# EAGLE board STorM32 BGC mpu module v009 pannelized4 (EAGLE 6.5.0)
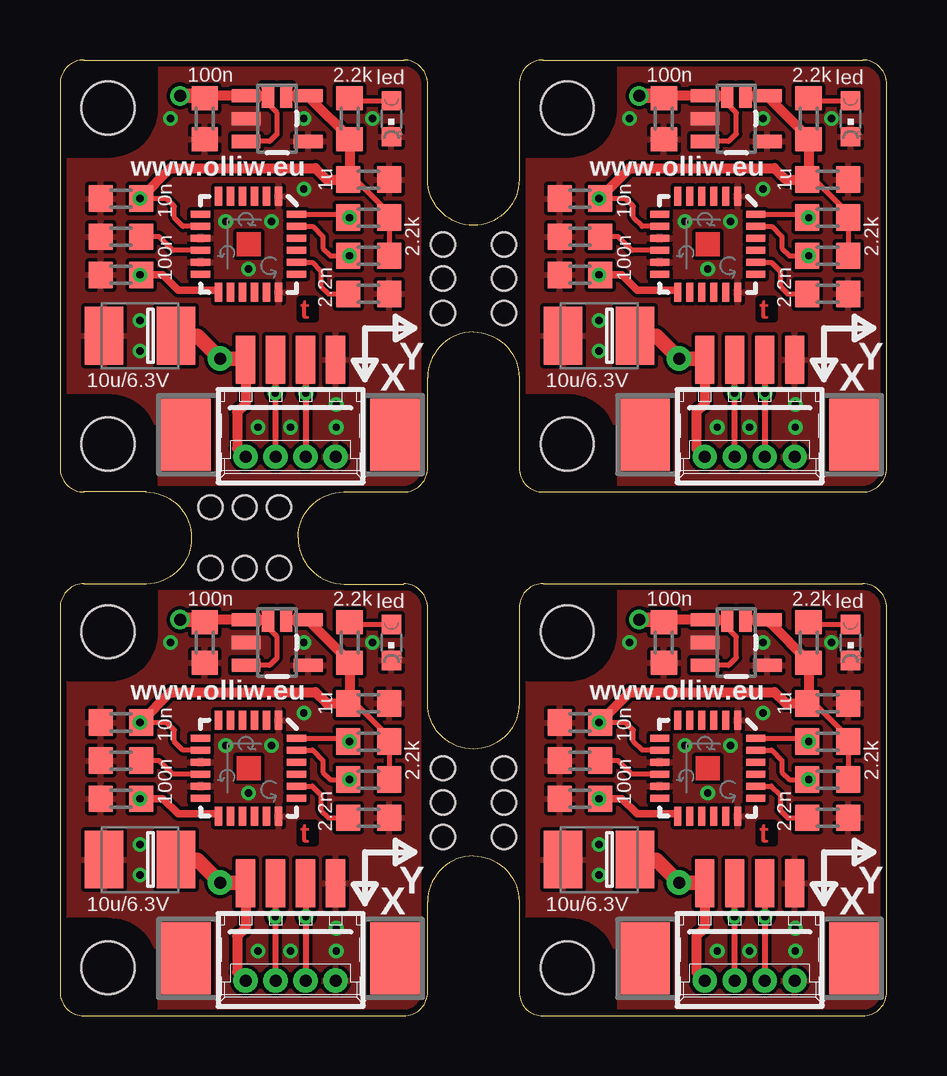
[diagram p0: board, top side]
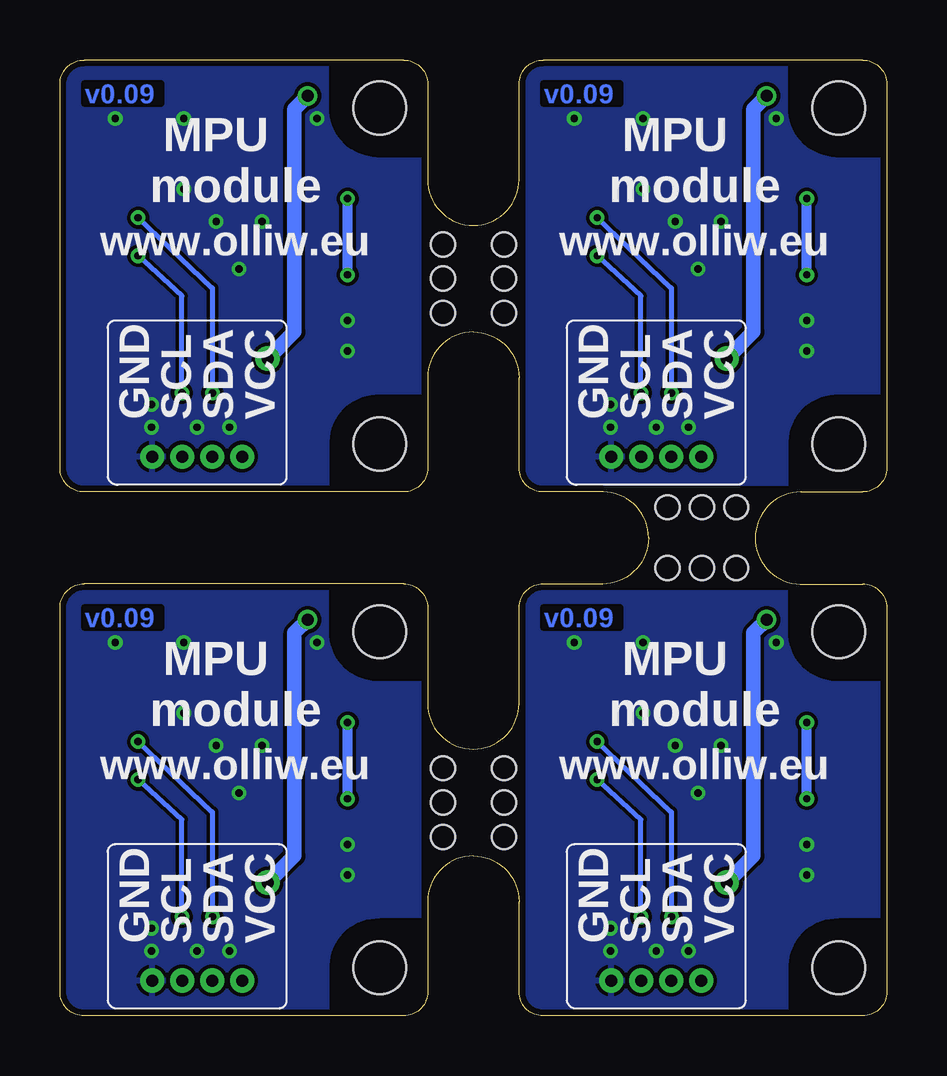
[diagram p1: board, bottom side, seen from below]

Size 34.45 x 39.83 mm. Coordinates in mm from the lower left corner, seen from the top.
Outline: 1,18 arc90 0,17 0,1 arc90 1,0 14.32,0 arc90 15.32,1
Outline: 15.32,17 arc90 14.32,18
Outline: 15.32,0.95 15.32,4.76 arc-90 17.22,6.67 arc-90 19.13,4.76 19.13,1 arc90 20.13,0 33.45,0 arc90 34.45,1 34.45,17 arc90 33.45,18 20.13,18 arc90 19.13,17 19.13,13.02 arc-90 17.22,11.11 arc-90 15.32,13.02 15.32,16.99
Outline: 15.32,38.83 arc90 14.32,39.83 1,39.83 arc90 0,38.83 0,22.83 arc90 1,21.83
Outline: 14.32,21.83 arc90 15.32,22.83
Outline: 15.32,22.78 15.32,26.59 arc-90 17.22,28.5 arc-90 19.13,26.59 19.13,22.83 arc90 20.13,21.83 33.45,21.83 arc90 34.45,22.83 34.45,38.83 arc90 33.45,39.83 20.13,39.83 arc90 19.13,38.83 19.13,34.85 arc-90 17.22,32.94 arc-90 15.32,34.85 15.32,38.81
Outline: 3.57,21.83 arc-90 5.48,19.92 arc-90 3.6,17.99
Outline: 11.83,21.83 arc90 9.92,19.92 arc90 11.85,17.99
Outline: 3.58,21.83 0.99,21.83
Outline: 3.58,17.99 0.99,17.99
Outline: 11.84,17.99 11.85,17.99
Outline: 11.85,17.99 14.33,17.99
Outline: 11.81,21.83 14.33,21.83
Copper layers (1*16): Top 0.035mm / dielectric 1.5mm / Bottom 0.035mm
Design rules "Fusion_eagle_rule_v1.1-shapes-supply-changed": minimum track width 6mil, minimum drill 12mil, track to track 6mil, track to pad 6mil, pad to pad 6mil, via to via 6mil, smd to smd 0mil, copper to edge 10mil, drill to drill 10mil, minimum pad ring 10mil, minimum via ring 6mil, stop-mask expansion 2mil, vias tented up to drill 100mil, thermal gap 6mil
Holes 2.2 mm at 2,2 2,16 21.13,2 21.13,16 2,23.83 2,37.83 21.13,23.83 21.13,37.83
Holes 1 mm at 15.95,10.32 15.95,8.89 15.95,7.46 18.49,10.32 18.49,8.89 18.49,7.46 15.95,32.15 15.95,30.72 15.95,29.29 18.49,32.15 18.49,30.72 18.49,29.29 6.27,18.65 7.7,18.65 9.13,18.65 6.27,21.19 7.7,21.19 9.13,21.19

## Footprints (pad centres in the part's own frame; a part is rotated, then mirrored left to right if it is on the bottom)
SMC_B = smd 1.6 x 2.4: + -1.5,0; - 1.5,0
C0603 = smd 1 x 1.1: 1 -0.85,0; 2 0.85,0
QFN-24 = smd 0.8 x 0.3: 1 -2,1.25; 2 -2,0.75; 3 -2,0.25; 4 -2,-0.25; 5 -2,-0.75; 6 -2,-1.25; 13 2,-1.25; 14 2,-0.75; 15 2,-0.25; 16 2,0.25; 17 2,0.75; 18 2,1.25 | smd 0.3 x 0.8: 7 -1.25,-2; 8 -0.75,-2; 9 -0.25,-2; 10 0.25,-2; 11 0.75,-2; 12 1.25,-2; 19 1.25,2; 20 0.75,2; 21 0.25,2; 22 -0.25,2; 23 -0.75,2; 24 -1.25,2
SOT23-5 = smd 0.55 x 1.2: 1 -0.95,-1.3; 2 0,-1.3; 3 0.95,-1.3; 4 0.95,1.3; 5 -0.95,1.3
MOLEX-53261-04-SMD-BOTH = smd 0.8 x 2: 1 1.875,-2.5; 2 0.625,-2.5; 3 -0.625,-2.5; 4 -1.875,-2.5 | drill 0.5 pad 0.698: 5 1.875,1.545; 6 0.625,1.545; 7 -0.625,1.545; 8 -1.875,1.545 | smd 2.1 x 3: S1 4.375,0.625; S2 -4.375,0.625
CHIPLED_0603 = smd 0.8 x 0.8: A 0,-0.75; C 0,0.75
R0603 = smd 1 x 1.1: 1 -0.85,0; 2 0.85,0
SJ_2S-NO = smd 0.508 x 1.016: 1 -0.381,0; 2 0.381,0

## Placement (x,y rotation side)
C1  10u/6.3V  [SMC_B]  3.33,6.51 180 top
C2  100n  [C0603]  6.03,15.56 270 top
C3  100n  [C0603]  2.54,9.05 180 top
C4  10n  [C0603]  2.54,12.22 180 top
C5  2.2n  [C0603]  12.86,8.25 0 top
C6  100n  [C0603]  2.54,10.64 180 top
C7  1u  [C0603]  12.86,13.02 0 top
C8  10u/6.3V  [SMC_B]  22.46,6.51 180 top
C9  100n  [C0603]  21.67,10.64 180 top
C10  10n  [C0603]  21.67,12.22 180 top
C11  2.2n  [C0603]  31.99,8.25 0 top
C12  100n  [C0603]  21.67,9.05 180 top
C13  100n  [C0603]  25.16,15.56 270 top
C14  1u  [C0603]  31.99,13.02 0 top
C15  10u/6.3V  [SMC_B]  3.33,28.34 180 top
C16  100n  [C0603]  2.54,32.46 180 top
C17  10n  [C0603]  2.54,34.05 180 top
C18  2.2n  [C0603]  12.86,30.08 0 top
C19  100n  [C0603]  2.54,30.88 180 top
C20  100n  [C0603]  6.03,37.39 270 top
C21  1u  [C0603]  12.86,34.85 0 top
C22  10u/6.3V  [SMC_B]  22.46,28.34 180 top
C23  100n  [C0603]  21.67,32.46 180 top
C24  10n  [C0603]  21.67,34.05 180 top
C25  2.2n  [C0603]  31.99,30.08 0 top
C26  100n  [C0603]  21.67,30.88 180 top
C27  100n  [C0603]  25.16,37.39 270 top
C28  1u  [C0603]  31.99,34.85 0 top
IC1  MPU6050  [QFN-24]  7.86,10.32 270 top
IC2  [SOT23-5]  9.05,15.56 270 top
IC3  MPU6050  [QFN-24]  26.99,10.32 270 top
IC4  [SOT23-5]  28.18,15.56 270 top
IC5  MPU6050  [QFN-24]  7.86,32.15 270 top
IC6  [SOT23-5]  9.05,37.39 270 top
IC7  MPU6050  [QFN-24]  26.99,32.15 270 top
IC8  [SOT23-5]  28.18,37.39 270 top
JP1  I2C#2  [MOLEX-53261-04-SMD-BOTH]  9.6,3.02 180 top
JP2  I2C#2  [MOLEX-53261-04-SMD-BOTH]  28.73,3.02 180 top
JP3  I2C#2  [MOLEX-53261-04-SMD-BOTH]  9.6,24.84 180 top
JP4  I2C#2  [MOLEX-53261-04-SMD-BOTH]  28.73,24.84 180 top
LED1  red  [CHIPLED_0603]  13.81,15.56 180 top
LED2  red  [CHIPLED_0603]  32.94,15.56 180 top
LED3  red  [CHIPLED_0603]  13.81,37.39 180 top
LED4  red  [CHIPLED_0603]  32.94,37.39 180 top
R1  2.2k  [R0603]  12.06,15.56 90 top
R2  2.2k  [R0603]  12.86,9.84 0 top
R3  2.2k  [R0603]  12.86,11.43 0 top
R4  2.2k  [R0603]  31.99,9.84 0 top
R5  2.2k  [R0603]  31.99,11.43 0 top
R6  2.2k  [R0603]  31.19,15.56 90 top
R7  2.2k  [R0603]  12.86,31.67 0 top
R8  2.2k  [R0603]  12.86,33.26 0 top
R9  2.2k  [R0603]  12.06,37.39 90 top
R10  2.2k  [R0603]  31.99,31.67 0 top
R11  2.2k  [R0603]  31.99,33.26 0 top
R12  2.2k  [R0603]  31.19,37.39 90 top
SJ1  SOLDERJUMPERNO  [SJ_2S-NO]  9.05,16.51 0 top
SJ2  SOLDERJUMPERNO  [SJ_2S-NO]  28.18,16.51 0 top
SJ3  SOLDERJUMPERNO  [SJ_2S-NO]  9.05,38.34 0 top
SJ4  SOLDERJUMPERNO  [SJ_2S-NO]  28.18,38.34 0 top

## Library data of the parts
C1-C28 R1-R12 = rcl
IC1-IC8 SJ1-SJ4 = # SparkFun2
JP1-JP4 = # stdlib
LED1-LED4 = led

## Nets
3.3V: C3.1 C4.1 C7.1 IC1.8 IC1.13 IC2.5 R1.1 R2.2 R3.2 SJ1.2
3.3V1: C10.1 C12.1 C14.1 IC3.8 IC3.13 IC4.5 R4.2 R5.2 R6.1 SJ2.2
3.3V2: C17.1 C19.1 C21.1 IC5.8 IC5.13 IC6.5 R7.2 R8.2 R9.1 SJ3.2
3.3V3: C24.1 C26.1 C28.1 IC7.8 IC7.13 IC8.5 R10.2 R11.2 R12.1 SJ4.2
5V: C1.+ C2.1 IC2.1 IC2.3 JP1.1 JP1.5 SJ1.1
5V1: C8.+ C13.1 IC4.1 IC4.3 JP2.1 JP2.5 SJ2.1
5V2: C15.+ C20.1 IC6.1 IC6.3 JP3.1 JP3.5 SJ3.1
5V3: C22.+ C27.1 IC8.1 IC8.3 JP4.1 JP4.5 SJ4.1
GND: C1.- C2.2 C3.2 C4.2 C5.2 C6.2 C7.2 IC1.1 IC1.9 IC1.11 IC1.18 IC2.2 IC2.4 JP1.4 JP1.8 LED1.C
GND4: C8.- C9.2 C10.2 C11.2 C12.2 C13.2 C14.2 IC3.1 IC3.9 IC3.11 IC3.18 IC4.2 IC4.4 JP2.4 JP2.8 LED2.C
GND5: C15.- C16.2 C17.2 C18.2 C19.2 C20.2 C21.2 IC5.1 IC5.9 IC5.11 IC5.18 IC6.2 IC6.4 JP3.4 JP3.8 LED3.C
GND6: C22.- C23.2 C24.2 C25.2 C26.2 C27.2 C28.2 IC7.1 IC7.9 IC7.11 IC7.18 IC8.2 IC8.4 JP4.4 JP4.8 LED4.C
N$1: LED2.A R6.2
N$2: C9.1 IC3.10
N$3: C11.1 IC3.20
N$4: LED3.A R9.2
N$5: C16.1 IC5.10
N$6: C18.1 IC5.20
N$7: LED4.A R12.2
N$8: C23.1 IC7.10
N$9: LED1.A R1.2
N$10: C25.1 IC7.20
N$20: C6.1 IC1.10
N$24: C5.1 IC1.20
SCL: IC1.23 JP1.3 JP1.7 R2.1
SCL1: IC3.23 JP2.3 JP2.7 R4.1
SCL2: IC5.23 JP3.3 JP3.7 R7.1
SCL3: IC7.23 JP4.3 JP4.7 R10.1
SDA: IC1.24 JP1.2 JP1.6 R3.1
SDA1: IC3.24 JP2.2 JP2.6 R5.1
SDA2: IC5.24 JP3.2 JP3.6 R8.1
SDA3: IC7.24 JP4.2 JP4.6 R11.1

## Tracks (layer width: path | path; a pad name or v marks a point on that pad's centre or on a via)
3.3V  (via drill 0.3 pad 0.61)
  Top 0.152: 13.65,11.67 R3.2 | v3.33,12.22 C4.1
  Top 0.203: R3.2 R2.2 | 13.65,11.67 12.38,12.94 12.09,12.94 C7.1 | IC1.8 5.12,11.07 4.76,11.43 4.76,11.91 4.45,12.22 C4.1 | IC2.5
  Top 0.305: 6.61,8.2 IC1.13 6.51,8.41 4.92,8.41 4.29,9.05 C3.1
  Top 0.406: C3.1 v3.33,9.05 | v3.33,12.22 4.6,13.49 10.64,13.49 11.11,13.02 C7.1 12.07,13.07 R1.1 12.07,14.76 10.48,16.35 IC2.5 | SJ1.2 IC2.5
  Bottom 0.406: v3.33,9.05 v3.33,12.22
3.3V1  (via drill 0.3 pad 0.61)
  Top 0.152: 32.78,11.67 R5.2 | v22.46,12.22 C10.1
  Top 0.203: R5.2 R4.2 | 32.78,11.67 31.51,12.94 31.22,12.94 C14.1 | IC3.8 24.25,11.07 23.89,11.43 23.89,11.91 23.57,12.22 C10.1 | IC4.5
  Top 0.305: 25.74,8.2 IC3.13 25.64,8.41 24.05,8.41 23.42,9.05 C12.1
  Top 0.406: C12.1 v22.46,9.05 | v22.46,12.22 23.73,13.49 29.77,13.49 30.24,13.02 C14.1 31.19,13.07 R6.1 31.19,14.76 29.61,16.35 IC4.5 | SJ2.2 IC4.5
  Bottom 0.406: v22.46,9.05 v22.46,12.22
3.3V2  (via drill 0.3 pad 0.61)
  Top 0.152: 13.65,33.5 R8.2 | v3.33,34.05 C17.1
  Top 0.203: R8.2 R7.2 | 13.65,33.5 12.38,34.77 12.09,34.77 C21.1 | IC5.8 5.12,32.9 4.76,33.26 4.76,33.73 4.45,34.05 C17.1 | IC6.5
  Top 0.305: 6.61,30.02 IC5.13 6.51,30.24 4.92,30.24 4.29,30.88 C19.1
  Top 0.406: C19.1 v3.33,30.88 | v3.33,34.05 4.6,35.32 10.64,35.32 11.11,34.85 C21.1 12.07,34.9 R9.1 12.07,36.59 10.48,38.18 IC6.5 | SJ3.2 IC6.5
  Bottom 0.406: v3.33,30.88 v3.33,34.05
3.3V3  (via drill 0.3 pad 0.61)
  Top 0.152: 32.78,33.5 R11.2 | v22.46,34.05 C24.1
  Top 0.203: R11.2 R10.2 | 32.78,33.5 31.51,34.77 31.22,34.77 C28.1 | IC7.8 24.25,32.9 23.89,33.26 23.89,33.73 23.57,34.05 C24.1 | IC8.5
  Top 0.305: 25.74,30.02 IC7.13 25.64,30.24 24.05,30.24 23.42,30.88 C26.1
  Top 0.406: C26.1 v22.46,30.88 | v22.46,34.05 23.73,35.32 29.77,35.32 30.24,34.85 C28.1 31.19,34.9 R12.1 31.19,36.59 29.61,38.18 IC8.5 | SJ4.2 IC8.5
  Bottom 0.406: v22.46,30.88 v22.46,34.05
5V  (via drill 0.5 pad 0.81, 0.5 pad 1.02)
  Top 0.203: IC2.3 8.73,14.61 9.05,14.92 9.05,15.8 8.67,16.18 SJ1.1
  Top 0.406: JP1.1 7.73,3.68 7.38,3.33 7.38,1.82 JP1.5 | C2.1 6.13,16.51 6.19,16.51 IC2.1 SJ1.1
  Top 0.61: 6.19,16.51 v5,16.51 | JP1.1 7.69,5.56 v6.67,5.56 5.72,6.51 C1.+
  Bottom 0.61: v6.67,5.56 5.56,6.67 5.56,15.95 v5,16.51
5V1  (via drill 0.5 pad 0.81, 0.5 pad 1.02)
  Top 0.203: IC4.3 27.86,14.61 28.18,14.92 28.18,15.8 27.8,16.18 SJ2.1
  Top 0.406: JP2.1 26.86,3.68 26.51,3.33 26.51,1.82 JP2.5 | C13.1 25.26,16.51 25.32,16.51 IC4.1 SJ2.1
  Top 0.61: 25.32,16.51 v24.13,16.51 | JP2.1 26.82,5.56 v25.8,5.56 24.84,6.51 C8.+
  Bottom 0.61: v25.8,5.56 24.69,6.67 24.69,15.95 v24.13,16.51
5V2  (via drill 0.5 pad 0.81, 0.5 pad 1.02)
  Top 0.203: IC6.3 8.73,36.43 9.05,36.75 9.05,37.62 8.67,38.01 SJ3.1
  Top 0.406: JP3.1 7.73,25.51 7.38,25.16 7.38,23.65 JP3.5 | C20.1 6.13,38.34 6.19,38.34 IC6.1 SJ3.1
  Top 0.61: 6.19,38.34 v5,38.34 | JP3.1 7.69,27.38 v6.67,27.38 5.72,28.34 C15.+
  Bottom 0.61: v6.67,27.38 5.56,28.5 5.56,37.78 v5,38.34
5V3  (via drill 0.5 pad 0.81, 0.5 pad 1.02)
  Top 0.203: IC8.3 27.86,36.43 28.18,36.75 28.18,37.62 27.8,38.01 SJ4.1
  Top 0.406: JP4.1 26.86,25.51 26.51,25.16 26.51,23.65 JP4.5 | C27.1 25.26,38.34 25.32,38.34 IC8.1 SJ4.1
  Top 0.61: 25.32,38.34 v24.13,38.34 | JP4.1 26.82,27.38 v25.8,27.38 24.84,28.34 C22.+
  Bottom 0.61: v25.8,27.38 24.69,28.5 24.69,37.78 v24.13,38.34
GND  (via drill 0.3 pad 0.61)
  other vias: 8.25,2.7 9.6,2.7 13.02,15.56 3.33,5.87 3.33,7.14 8.81,11.27 6.91,11.27 7.86,9.29 11.51,2.7 11.51,3.65 10.16,12.62 4.6,15.56 10.16,15.56
  pour Bottom (isolate 0.152): 0.33,17 arc-90 1,17.67 14.32,17.67 arc-90 14.99,17 14.99,1 arc-90 14.32,0.33 1,0.33 arc-90 0.33,1
  pour Top (isolate 0.152): 0.33,17 arc-90 1,17.67 14.32,17.67 arc-90 14.99,17 14.99,1 arc-90 14.32,0.33 1,0.33 arc-90 0.33,1
  cutout Bottom: 0.27,13.96 2.12,13.96 arc90 4.08,16.02 4.08,17.77 1.02,17.77 arc90 0.27,17.02
  cutout Top: 0.27,13.96 2.12,13.96 arc90 4.08,16.02 4.08,17.77 1.02,17.77 arc90 0.27,17.02
  cutout Bottom: 4.06,0.25 4.06,2.1 arc90 2,4.06 0.25,4.06 0.25,1 arc90 1,0.25
  cutout Top: 4.06,0.25 4.06,2.1 arc90 2,4.06 0.25,4.06 0.25,1 arc90 1,0.25
  pour Top (no thermals): 6.91,16.03 8.65,16.03 8.65,15.08 6.91,15.08
GND4  (via drill 0.3 pad 0.61)
  other vias: 27.38,2.7 28.73,2.7 32.15,15.56 22.46,5.87 22.46,7.14 27.94,11.27 26.04,11.27 26.99,9.29 30.64,2.7 30.64,3.65 29.29,12.62 23.73,15.56 29.29,15.56
  pour Bottom (isolate 0.152): 19.46,17 arc-90 20.13,17.67 33.45,17.67 arc-90 34.12,17 34.12,1 arc-90 33.45,0.33 20.13,0.33 arc-90 19.46,1
  pour Top (isolate 0.152): 19.46,17 arc-90 20.13,17.67 33.45,17.67 arc-90 34.12,17 34.12,1 arc-90 33.45,0.33 20.13,0.33 arc-90 19.46,1
  cutout Bottom: 19.4,13.96 21.25,13.96 arc90 23.21,16.02 23.21,17.77 20.15,17.77 arc90 19.4,17.02
  cutout Top: 19.4,13.96 21.25,13.96 arc90 23.21,16.02 23.21,17.77 20.15,17.77 arc90 19.4,17.02
  cutout Bottom: 23.19,0.25 23.19,2.1 arc90 21.13,4.06 19.38,4.06 19.38,1 arc90 20.13,0.25
  cutout Top: 23.19,0.25 23.19,2.1 arc90 21.13,4.06 19.38,4.06 19.38,1 arc90 20.13,0.25
  pour Top (no thermals): 26.04,16.03 27.78,16.03 27.78,15.08 26.04,15.08
GND5  (via drill 0.3 pad 0.61)
  other vias: 8.25,24.53 9.6,24.53 13.02,37.39 3.33,27.7 3.33,28.97 8.81,33.1 6.91,33.1 7.86,31.11 11.51,24.53 11.51,25.48 10.16,34.45 4.6,37.39 10.16,37.39
  pour Bottom (isolate 0.152): 0.33,38.83 arc-90 1,39.5 14.32,39.5 arc-90 14.99,38.83 14.99,22.83 arc-90 14.32,22.16 1,22.16 arc-90 0.33,22.83
  pour Top (isolate 0.152): 0.33,38.83 arc-90 1,39.5 14.32,39.5 arc-90 14.99,38.83 14.99,22.83 arc-90 14.32,22.16 1,22.16 arc-90 0.33,22.83
  cutout Bottom: 0.27,35.79 2.12,35.79 arc90 4.08,37.84 4.08,39.59 1.02,39.59 arc90 0.27,38.84
  cutout Top: 0.27,35.79 2.12,35.79 arc90 4.08,37.84 4.08,39.59 1.02,39.59 arc90 0.27,38.84
  cutout Bottom: 4.06,22.08 4.06,23.93 arc90 2,25.89 0.25,25.89 0.25,22.83 arc90 1,22.08
  cutout Top: 4.06,22.08 4.06,23.93 arc90 2,25.89 0.25,25.89 0.25,22.83 arc90 1,22.08
  pour Top (no thermals): 6.91,37.86 8.65,37.86 8.65,36.91 6.91,36.91
GND6  (via drill 0.3 pad 0.61)
  other vias: 27.38,24.53 28.73,24.53 32.15,37.39 22.46,27.7 22.46,28.97 27.94,33.1 26.04,33.1 26.99,31.11 30.64,24.53 30.64,25.48 29.29,34.45 23.73,37.39 29.29,37.39
  pour Bottom (isolate 0.152): 19.46,38.83 arc-90 20.13,39.5 33.45,39.5 arc-90 34.12,38.83 34.12,22.83 arc-90 33.45,22.16 20.13,22.16 arc-90 19.46,22.83
  pour Top (isolate 0.152): 19.46,38.83 arc-90 20.13,39.5 33.45,39.5 arc-90 34.12,38.83 34.12,22.83 arc-90 33.45,22.16 20.13,22.16 arc-90 19.46,22.83
  cutout Bottom: 19.4,35.79 21.25,35.79 arc90 23.21,37.84 23.21,39.59 20.15,39.59 arc90 19.4,38.84
  cutout Top: 19.4,35.79 21.25,35.79 arc90 23.21,37.84 23.21,39.59 20.15,39.59 arc90 19.4,38.84
  cutout Bottom: 23.19,22.08 23.19,23.93 arc90 21.13,25.89 19.38,25.89 19.38,22.83 arc90 20.13,22.08
  cutout Top: 23.19,22.08 23.19,23.93 arc90 21.13,25.89 19.38,25.89 19.38,22.83 arc90 20.13,22.08
  pour Top (no thermals): 26.04,37.86 27.78,37.86 27.78,36.91 26.04,36.91
N$1
  Top 0.152: R6.2 31.45,16.31
  Top 0.203: 31.45,16.31 LED2.A
N$2
  Top 0.203: IC3.10 23.82,10.07 23.26,10.64 C9.1
N$3
  Top 0.203: IC3.20 29.64,9.57 30,9.21 30,8.57 30.32,8.26 C11.1
N$4
  Top 0.152: R9.2 12.32,38.14
  Top 0.203: 12.32,38.14 LED3.A
N$5
  Top 0.203: IC5.10 4.7,31.9 4.13,32.46 C16.1
N$6
  Top 0.203: IC5.20 10.51,31.4 10.87,31.04 10.87,30.4 11.19,30.08 C18.1
N$7
  Top 0.152: R12.2 31.45,38.14
  Top 0.203: 31.45,38.14 LED4.A
N$8
  Top 0.203: IC7.10 23.82,31.9 23.26,32.46 C23.1
N$9
  Top 0.152: R1.2 12.32,16.31
  Top 0.203: 12.32,16.31 LED1.A
N$10
  Top 0.203: IC7.20 29.64,31.4 30,31.04 30,30.4 30.32,30.08 C25.1
N$20
  Top 0.203: IC1.10 4.7,10.07 4.13,10.64 C6.1
N$24
  Top 0.203: IC1.20 10.51,9.57 10.87,9.21 10.87,8.57 11.19,8.26 C5.1
SCL  (via drill 0.3 pad 0.61)
  Top 0.152: JP1.3 10.23,5.39 | v12.07,9.84 12.07,9.9 R2.1
  Top 0.203: IC1.23 10.52,11.07 10.95,10.64 10.95,10.16 11.27,9.84 R2.1 | 10.24,1.48 JP1.7
  Top 0.254: 10.23,5.39 v10.24,4.13 10.24,1.48
  Bottom 0.203: v10.24,4.13 10.24,8.18 v12.07,9.84
SCL1  (via drill 0.3 pad 0.61)
  Top 0.152: JP2.3 29.36,5.39 | v31.19,9.84 31.19,9.9 R4.1
  Top 0.203: IC3.23 29.65,11.07 30.08,10.64 30.08,10.16 30.4,9.84 R4.1 | 29.37,1.48 JP2.7
  Top 0.254: 29.36,5.39 v29.37,4.13 29.37,1.48
  Bottom 0.203: v29.37,4.13 29.37,8.18 v31.19,9.84
SCL2  (via drill 0.3 pad 0.61)
  Top 0.152: JP3.3 10.23,27.22 | v12.07,31.67 12.07,31.73 R7.1
  Top 0.203: IC5.23 10.52,32.9 10.95,32.46 10.95,31.99 11.27,31.67 R7.1 | JP3.7
  Top 0.254: 10.23,27.22 v10.24,25.96 JP3.7
  Bottom 0.203: v10.24,25.96 10.24,30 v12.07,31.67
SCL3  (via drill 0.3 pad 0.61)
  Top 0.152: JP4.3 29.36,27.22 | v31.19,31.67 31.19,31.73 R10.1
  Top 0.203: IC7.23 29.65,32.9 30.08,32.46 30.08,31.99 30.4,31.67 R10.1 | JP4.7
  Top 0.254: 29.36,27.22 v29.37,25.96 JP4.7
  Bottom 0.203: v29.37,25.96 29.37,30 v31.19,31.67
SDA  (via drill 0.3 pad 0.61)
  Top 0.152: 11.87,11.57 R3.1 12.07,11.49 v12.07,11.43 | JP1.2 8.98,5.55
  Top 0.203: IC1.24 11.87,11.57 | 8.97,1.48 JP1.6
  Top 0.254: 8.98,5.55 v8.97,4.13 8.97,1.48
  Bottom 0.203: v12.07,11.43 8.97,8.49 v8.97,4.13
SDA1  (via drill 0.3 pad 0.61)
  Top 0.152: 31,11.57 R5.1 31.19,11.49 v31.19,11.43 | JP2.2 28.11,5.55
  Top 0.203: IC3.24 31,11.57 | 28.1,1.48 JP2.6
  Top 0.254: 28.11,5.55 v28.1,4.13 28.1,1.48
  Bottom 0.203: v31.19,11.43 28.1,8.49 v28.1,4.13
SDA2  (via drill 0.3 pad 0.61)
  Top 0.152: 11.87,33.4 R8.1 12.07,33.31 v12.07,33.26 | JP3.2 8.98,27.37
  Top 0.203: IC5.24 11.87,33.4 | JP3.6
  Top 0.254: 8.98,27.37 v8.97,25.96 JP3.6
  Bottom 0.203: v12.07,33.26 8.97,30.32 v8.97,25.96
SDA3  (via drill 0.3 pad 0.61)
  Top 0.152: 31,33.4 R11.1 31.19,33.31 v31.19,33.26 | JP4.2 28.11,27.37
  Top 0.203: IC7.24 31,33.4 | JP4.6
  Top 0.254: 28.11,27.37 v28.1,25.96 JP4.6
  Bottom 0.203: v31.19,33.26 28.1,30.32 v28.1,25.96

## Text on the board
Top: t | t | t | t
Bottom: v0.09 | v0.09 | v0.09 | v0.09
tNames: led | led | www.olliw.eu | www.olliw.eu | Y | Y | X | X | led | led | www.olliw.eu | www.olliw.eu | Y | Y | X | X
bNames: MPU / module | MPU / module | www.olliw.eu | www.olliw.eu | VCC | SDA | SCL | GND | VCC | SDA | SCL | GND | MPU / module | MPU / module | www.olliw.eu | www.olliw.eu | VCC | SDA | SCL | GND | VCC | SDA | SCL | GND